# Altium PCB EE52_Digital_Oscilloscope.PcbDoc (part 5 of 5)
Units mil, origin at the board's own origin, x right, y up, seen from the top; angles counter-clockwise.
Board outline 7431 x 5662 mil, 2 copper layers (Top Layer, Bottom Layer); 305 components, 396 nets, 1532 pads, 389 vias.
Unrouted connection lines stored in the file: 2.
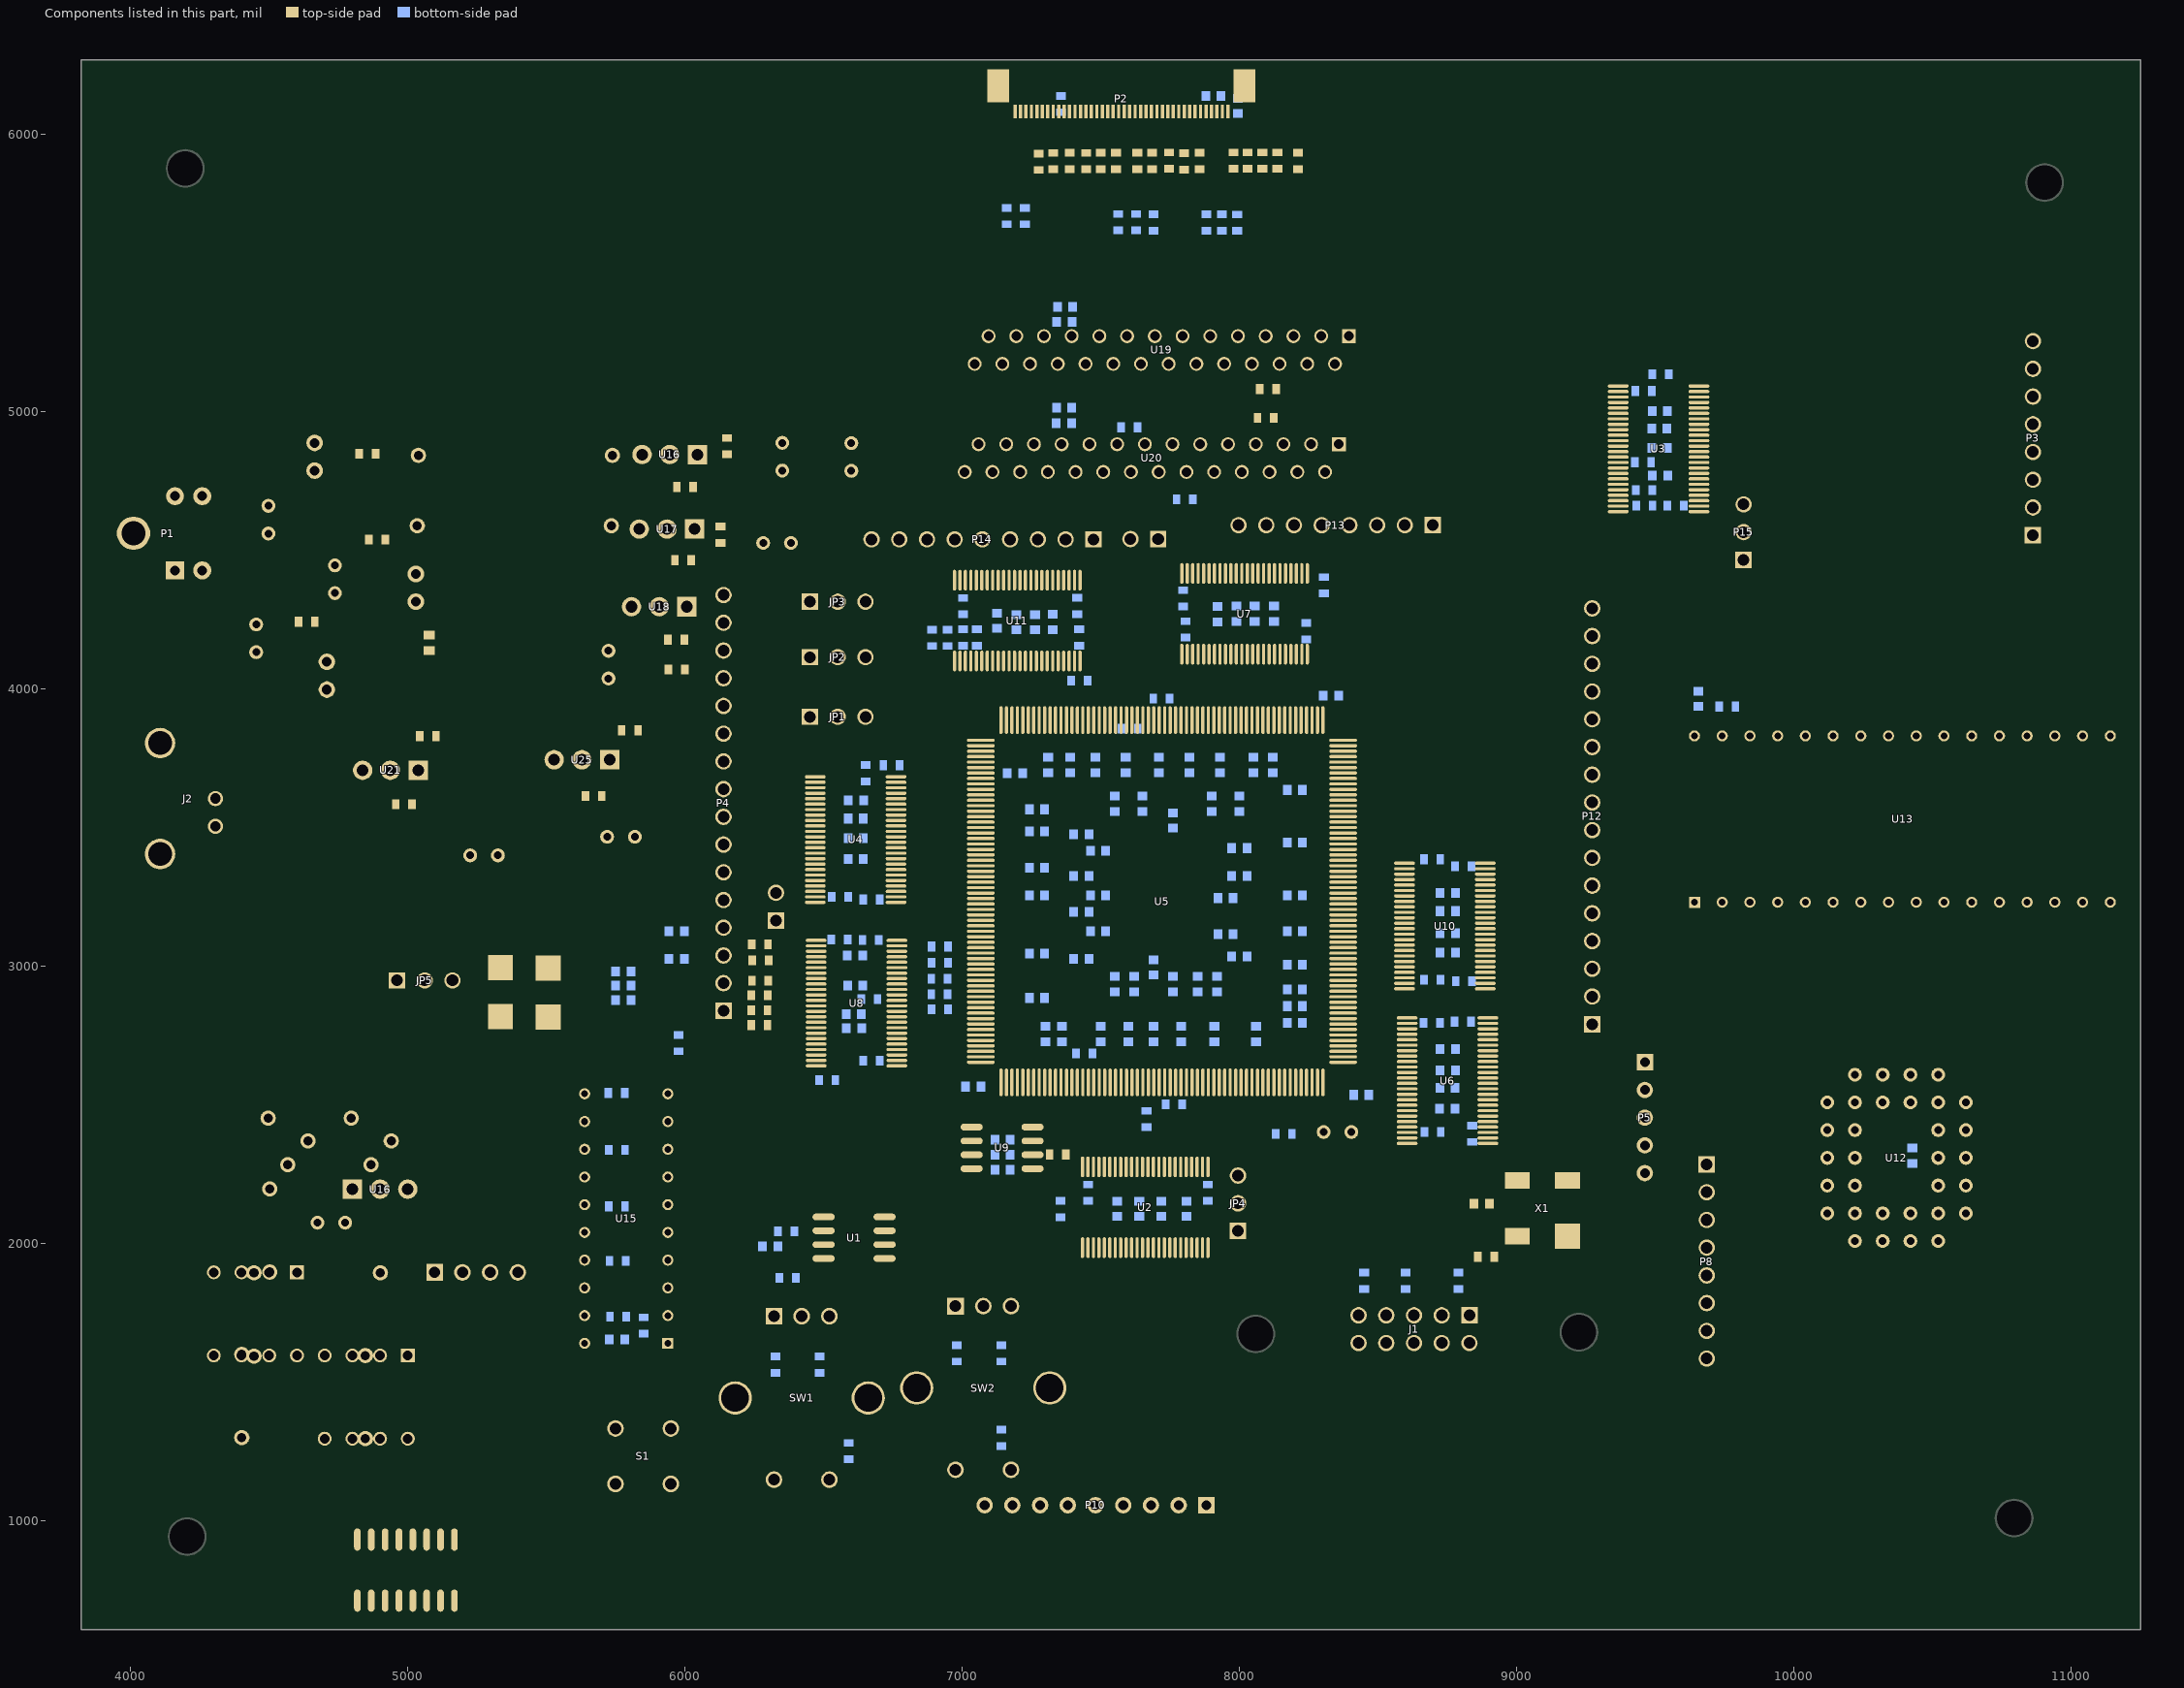
[diagram p5: the components of this part, seen from the top]

## Silkscreen, mask and mechanical layers (free items; w line width, h text height)
Top Overlay:
  text "Maitreyi Ashok" at 8976,6032 h120
  text "VLED" at 6501,6007 h60
  text "EE 52 Digital" at 9056,5851 h120
  text "Oscilloscope" at 9072,5708 h120
  text "2016-2017" at 9235,5513 h120
  text "GND" at 10338,5454 h60
  text "GND" at 6633,5284 h60
  text "DB3" at 10620,5225 h60
  text "MT42C4255" at 8468,5178 h60
  text "DB4" at 10619,5128 h60
  text "VLED" at 6418,5120 h60
  text "DB5" at 10618,5029 h60
  text "MT42C4255" at 8332,4988 h60
  text "10uF" at 6264,4962 h40
  text "Vcc5" at 4371,4958 h60
  text "Vcc33" at 6640,4958 h60
  text "1 Ohm" at 5272,4954 h40
  text "LM1086" at 5828,4933 h40
  text "DB6" at 10619,4928 h60
  text "300" at 4882,4879 h40
  text "DB7" at 10617,4818 h60
  text "0" at 6193,4817 h40
  text "47uF" at 4388,4731 h40
  text "4.7uF" at 6693,4730 h40
  text "DB2" at 10612,4722 h60
  text "121" at 5850,4713 h40
  text "Vcc5" at 4796,4695 h60
  text "DB2" at 8538,4669 h40
  text "DB0" at 8141,4665 h40
  text "DB4" at 7921,4663 h40
  text "DB6" at 8341,4662 h40
  text "LM1086" at 5830,4650 h40
  text "AB17" at 9907,4635 h60
  text "DB1" at 10614,4618 h60
  text "AB8" at 7405,4612 h40
  text "AB0" at 6609,4609 h40
  text "AB7" at 7020,4609 h40
  text "AB2" at 6829,4608 h40
  text "AB5" at 7231,4606 h40
  text "IO166" at 7676,4606 h40
  text "AB16" at 9907,4526 h60
  text "DB0" at 10612,4518 h60
  text "1K" at 4950,4516 h40
  text "DB5" at 8045,4480 h40
  text "DB1" at 8249,4476 h40
  text "DB7" at 8446,4470 h40
  text "DB3" at 8651,4467 h40
  text "121" at 6088,4459 h40
  text "1 Ohm" at 5279,4441 h40
  text "Vcc" at 6453,4435 h60
  text "AB4" at 7125,4431 h40
  text "AB3" at 6928,4430 h40
  text "AB6" at 7333,4430 h40
  text "IO167" at 7518,4430 h40
  text "AB1" at 6726,4425 h40
  text "AB18" at 9907,4422 h60
  text "121" at 5964,4384 h40
  text "Int" at 6485,4384 h40
  text "10uF" at 6248,4371 h40
  text "10uF" at 4475,4359 h40
  text "GND" at 10980,4327 h60
  text "1" at 6720,4325 h30
  text "IO189" at 6207,4316 h40
  text "LM1086" at 5515,4296 h40
  text "1K" at 4576.2,4284 h40
  text "Vpp" at 5170,4280 h60
  text "AB14" at 8982,4268 h60
  text "0" at 6360,4265 h30
  text "IO194" at 6210,4205 h40
  text "MSEL2" at 6412,4181 h60
  text "200" at 5809,4168 h40
  text "AB8" at 9032,4166 h60
  text "10uF" at 4180,4155 h40
  text "1" at 6720,4125 h30
  text "IO195" at 6206,4123 h40
  text "0" at 6365,4075 h30
  text "GNDA" at 5205,4070 h60
  text "AB13" at 8984,4068 h60
  text "10uF" at 5456,4041 h40
  text "GND" at 8432,4041 h60
  text "Vpp" at 5001,4016 h60
  text "IO196" at 6204,4014 h40
  text "121" at 5851,3996 h40
  text "MSEL1" at 6419,3984 h60
  text "AB12" at 8983,3964 h60
  text "IO197" at 6210,3935 h40
  text "HM628128" at 10404,3931 h60
  text "300" at 5778,3903 h40
  text "0" at 6360,3885 h30
  text "AB15" at 8982,3867 h60
  text "Vee" at 4639.5,3857.5 h60
  text "1" at 6720,3846 h30
  text "165" at 5152,3819 h40
  text "IO198" at 6208,3817 h40
  text "MSEL0" at 6413,3770 h60
  text "AB11" at 9002,3765 h60
  text "GND" at 5890,3740 h60
  text "Vee" at 4513,3730 h60
  text "LM1086" at 5130,3726 h40
  text "IO199" at 6208,3708 h40
  text "AB6" at 9029,3670 h60
  text "LM1086" at 5240,3645 h40
  text "IO200" at 6206,3607 h40
  text "100" at 5732,3591 h40
  text "AB9" at 9028,3568 h60
  text "10uF" at 5858,3554 h40
  text "IO201" at 6208,3518 h40
  text "100" at 4915,3493 h40
  text "AB10" at 8983,3470 h60
  text "10uF" at 5397,3444 h40
  text "IO202" at 6204,3426 h40
  text "AB4" at 9041,3363 h60
  text "IO203" at 5890,3335 h40
  text "223" at 6317,3332 h40
  text "AB5" at 9043,3259 h60
  text "Vcc3A" at 4907,3249 h60
  text "Vcc5A" at 5397,3238 h60
  text "IO207" at 5892,3215 h40
  text "224" at 6396,3169 h40
  text "AB7" at 9046,3157 h60
  text "IO214" at 5890,3155 h40
  text "LSM115JE3" at 5268,3082 h40
  text "ADC" at 4965,3078 h60
  text "AB2" at 9043,3058 h60
  text "216" at 5970,3055 h40
  text "Bypass" at 4788,3020 h40
  text "Shift" at 5090,3019 h40
  text "AB3" at 9038,2961 h60
  text "217" at 5968,2946 h40
  text "AB0" at 9039,2866 h60
  text "218" at 5971,2813 h40
  text "AB1" at 9041,2771 h60
  text "IO70" at 9534,2631 h40
  text "IO69" at 9534,2536 h40
  text "29F040" at 10707,2468 h60
  text "IO68" at 9533,2441 h40
  text "R1" at 4377,2431 h40
  text "121" at 5004,2361 h40
  text "IO65" at 9535,2360 h40
  text "25" at 7310,2359 h40
  text "R4" at 4532,2352 h40
  text "4.7K" at 4908,2282 h40
  text "R2" at 4457,2268 h40
  text "74HCT244" at 6060,2265 h60
  text "IO63" at 9754,2264 h40
  text "4.7uF" at 8390,2244 h40
  text "LM1086-ADJ" at 5074,2201 h40
  text "EPCS16" at 6647,2192 h60
  text "IO57" at 9758,2159 h40
  text "IO64" at 9403,2144 h40
  text "R48" at 4561,2136 h40
  text "U1" at 5074,2132 h40
  text "GND" at 7047,2123 h60
  text "IO56" at 9762,2063 h40
  text "R3" at 4957,2061 h40
  text "10K" at 4360,2026 h40
  text "MAX705" at 6800,2009 h60
  text "C1" at 4564,2002 h40
  text "2.4K" at 4966,1994 h40
  text "10uF" at 4623,1980 h40
  text "P6" at 5227,1973 h40
  text "IO55" at 9761,1967 h40
  text "OSCOE" at 9297,1966 h60
  text "CLK" at 7935,1904 h60
  text "IO52" at 9765,1864 h40
  text "U23" at 4669,1788 h40
  text "2.2K" at 4486,1785 h40
  text "IE0524S" at 5206,1778 h40
  text "IO51" at 9763,1766 h40
  text "R47" at 4276,1735 h40
  text "LM318N" at 4732,1689 h40
  text "IO50" at 9761,1666 h40
  text "GND" at 9989,1568 h60
  text "IO49" at 9763,1566 h40
  text "2.2K" at 4900,1472 h40
  text "JTAG" at 8441,1464 h60
  text "R50" at 4238,1446 h40
  text "R49" at 4679,1436 h40
  text "4.7K" at 4450,1431 h40
  text "U24" at 5088,1422 h40
  text "GND" at 7902,1259 h60
  text "GND" at 6652,1084 h60
  text "Reset" at 5723,898 h60
  text "IO21" at 7205,790 h60 r90
  text "IO41" at 7716,779 h60 r90
  text "IO44" at 7918,778 h60 r90
  text "IO39" at 7615,767 h60 r90
  text "IO20" at 7105,766 h60 r90
  text "IO22" at 7309,763 h60 r90
  text "IO38" at 7519,763 h60 r90
  text "IO43" at 7826,763 h60 r90
  text "IO37" at 7411,758 h60 r90
Bottom Overlay:
  text "1uF" at 7545,5370 h40
  text "10nF" at 7568,5306 h40
  text "DB3" at 10784,5222 h60
  text "DB4" at 10772,5126 h60
  text "1uF" at 7509,5039 h40
  text "DB5" at 10772,5027 h60
  text "10nF" at 7554,4947 h40
  text "DB6" at 10777,4923 h60
  text "DB7" at 10762,4817 h60
  text "DB2" at 10762,4720 h60
  text "DB2" at 8643,4667 h40
  text "DB0" at 8244,4665 h40
  text "DB6" at 8446,4664 h40
  text "DB4" at 8024,4661 h40
  text "AB17" at 10115,4629 h60
  text "DB1" at 10765,4612 h60
  text "AB8" at 7511,4611 h40
  text "AB0" at 6721,4608 h40
  text "AB7" at 7119,4607 h40
  text "AB2" at 6933,4604 h40
  text "AB5" at 7330,4604 h40
  text "IO166" at 7847,4604 h40
  text "DB0" at 10762,4525 h60
  text "AB16" at 10117,4522 h60
  text "DB1" at 8338,4477 h40
  text "DB5" at 8147,4476 h40
  text "DB7" at 8545,4475 h40
  text "DB3" at 8764,4469 h40
  text "AB3" at 7031,4431 h40
  text "AB4" at 7226,4428 h40
  text "AB6" at 7437,4428 h40
  text "IO167" at 7693,4426 h40
  text "AB1" at 6824,4424 h40
  text "AB18" at 10110,4424 h60
  text "IO189" at 6383,4314 h40
  text "AB14" at 9196,4265 h60
  text "IO194" at 6380,4205 h40
  text "AB8" at 9193,4164 h60
  text "IO195" at 6381,4125 h40
  text "AB13" at 9189,4068 h60
  text "IO196" at 6380,4013 h40
  text "AB12" at 9184,3965 h60
  text "IO197" at 6380,3935 h40
  text "AB15" at 9183,3865 h60
  text "IO198" at 6380,3818 h40
  text "AB11" at 9186,3767 h60
  text "IO199" at 6382,3710 h40
  text "AB6" at 9188,3670 h60
  text "10nF" at 7727.5,3665.5 h30 r90
  text "2.2nF" at 7883,3639 h30
  text "IO200" at 6384.21,3607.79 h40
  text "AB9" at 9189,3570 h60
  text "IO201" at 6382,3518 h40
  text "AB10" at 9188,3474 h60
  text "22nF" at 7911,3463 h30
  text "IO202" at 6376,3426 h40
  text "AB4" at 9198,3361 h60
  text "2.2nF" at 7535,3356 h28
  text "IO203" at 6060,3335 h40
  text "223" at 6424.17,3325 h40
  text "4.7nF" at 8280,3295 h40
  text "AB5" at 9199,3261 h60
  text "4.7nF" at 7892.5,3229.5 h40
  text "IO207" at 6066,3217 h40
  text "10nF" at 7320,3185 h35
  text "224" at 6495,3169 h40
  text "AB7" at 9186,3167 h60
  text "IO214" at 6070,3155 h40
  text "10nF" at 8003,3147.5 h30
  text "1nF" at 7430,3095 h30
  text "AB2" at 9201,3065 h60
  text "216" at 6070,3055 h40
  text "AB3" at 9201,2961 h60
  text "217" at 6074,2950 h40
  text "2.2nF" at 7723,2940.5 h30 r90
  text "AB0" at 9198,2866 h60
  text "218" at 6073,2816 h40
  text "AB1" at 9186,2767 h60
  text "IO70" at 9675,2628 h40
  text "IO69" at 9673,2542 h40
  text "IO68" at 9683,2442 h40
  text "IO65" at 9678,2361 h40
  text "IO63" at 9898,2267 h40
  text "IO57" at 9901,2159 h40
  text "IO64" at 9538,2142 h40
  text "IO56" at 9903,2068 h40
  text "IO55" at 9903,1971 h40
  text "22nF" at 6610,1947 h40
  text "IO52" at 9910,1872 h40
  text "1K" at 8750,1855 h40
  text "IO51" at 9899,1772 h40
  text "IO50" at 9898,1669 h40
  text "IO49" at 9903,1573 h40
  text "IO22" at 7309,965 h60 r90
  text "IO20" at 7097,962 h60 r90
  text "IO44" at 7916,962 h60 r90
  text "IO37" at 7416,959 h60 r90
  text "IO41" at 7715,959 h60 r90
  text "IO43" at 7814,959 h60 r90
  text "IO21" at 7204,956 h60 r90
  text "IO39" at 7614,956 h60 r90
  text "IO38" at 7524,953 h60 r90
Mechanical 1:
  lines w10: 3815,961 3815,597 4181,597 ; 3815,5901 3815,6270 4239,6270 ; 10885,597 11256.46,597 11256.46,1251.62

## Text inside footprints (layer, text, board x,y; h text height)
C51: Top Overlay "+" at 6560,4716 h70 r270
C74: Top Overlay "+" at 8230,2458 h70 r180
C101: Top Overlay "+" at 6311,4717 h40 r270
C102: Top Overlay "+" at 5649,3506 h40 r180
C103: Top Overlay "+" at 6212,4566 h40 r180
C104: Top Overlay "+" at 5684,3967 h40 r270
C110: Top Overlay "+" at 4493,4302 h40 r90
C112: Top Overlay "+" at 4829,1990 h40
C112: Top Overlay "+" at 4413,4505 h40 r270
C113: Top Overlay "+" at 4777,4515 h40 r90
C119: Top Overlay "+" at 5155,3439 h70 r180
J1: Top Overlay "10" at 8365,1659 h40 r180; Top Overlay "9" at 8362,1796 h40 r180; Top Overlay "1" at 8910,1760 h40 r180; Top Overlay "2" at 8930,1660 h40 r180
?: Top Overlay "I" at 8604,5801 h18 r118; Top Overlay "A" at 8599,5910 h18 r60; Top Overlay "I" at 8594,5895 h18 r69; Top Overlay "C" at 8645.81,5755.54 h18 r141; Top Overlay "L" at 8616.91,5782.03 h18 r123; Top Overlay "F" at 8597.62,5816.16 h18 r105; Top Overlay "O" at 8592.21,5835.06 h18 r96; Top Overlay "R" at 8589.82,5854.58 h18 r87; Top Overlay "N" at 8590.51,5874.23 h18 r78; Top Overlay "A" at 8630.32,5767.65 h18 r132; Top Overlay "I" at 8618,5939 h18 r48; Top Overlay "N" at 8629,5950 h18 r40; Top Overlay "I" at 8679,5979 h18 r16; Top Overlay "O" at 8773,5970 h18 r328; Top Overlay "L" at 8836.16,5822.37 h18 r254; Top Overlay "N" at 8841.48,5863.81 h18 r272; Top Overlay "H" at 8838.95,5884.62 h18 r282; Top Overlay "C" at 8833.02,5904.73 h18 r292; Top Overlay "E" at 8823.86,5923.58 h18 r301; Top Overlay "T" at 8811.7,5940.66 h18 r310; Top Overlay "Y" at 8804,5769 h18 r225; Top Overlay "G" at 8818,5785 h18 r234; Top Overlay "O" at 8840.54,5842.87 h18 r263; Top Overlay "O" at 8828.45,5802.88 h18 r244; Top Overlay "S" at 8644.52,5962.36 h18 r32; Top Overlay "T" at 8659.59,5971.16 h18 r24; Top Overlay "F" at 8791.52,5957.97 h18 r320; Top Overlay "E" at 8744.65,5980.54 h18 r344; Top Overlay "T" at 8727.44,5983.48 h18 r352; Top Overlay "U" at 8710,5984 h18; Top Overlay "T" at 8692.65,5982.09 h18 r8